# Altium PCB DIOT_SYS_extender_card.PcbDoc (part 2 of 6)
Units mm, origin at the board's own origin, x right, y up, seen from the top; angles counter-clockwise.
Board outline 280.04 x 100 mm, 6 copper layers (Top Layer, L2GND, L3, L4, L5GND, Bottom Layer), stack 1.558 mm thick; 18 components, 344 nets, 1062 pads, 179 vias.
Unrouted connection lines stored in the file: 389.
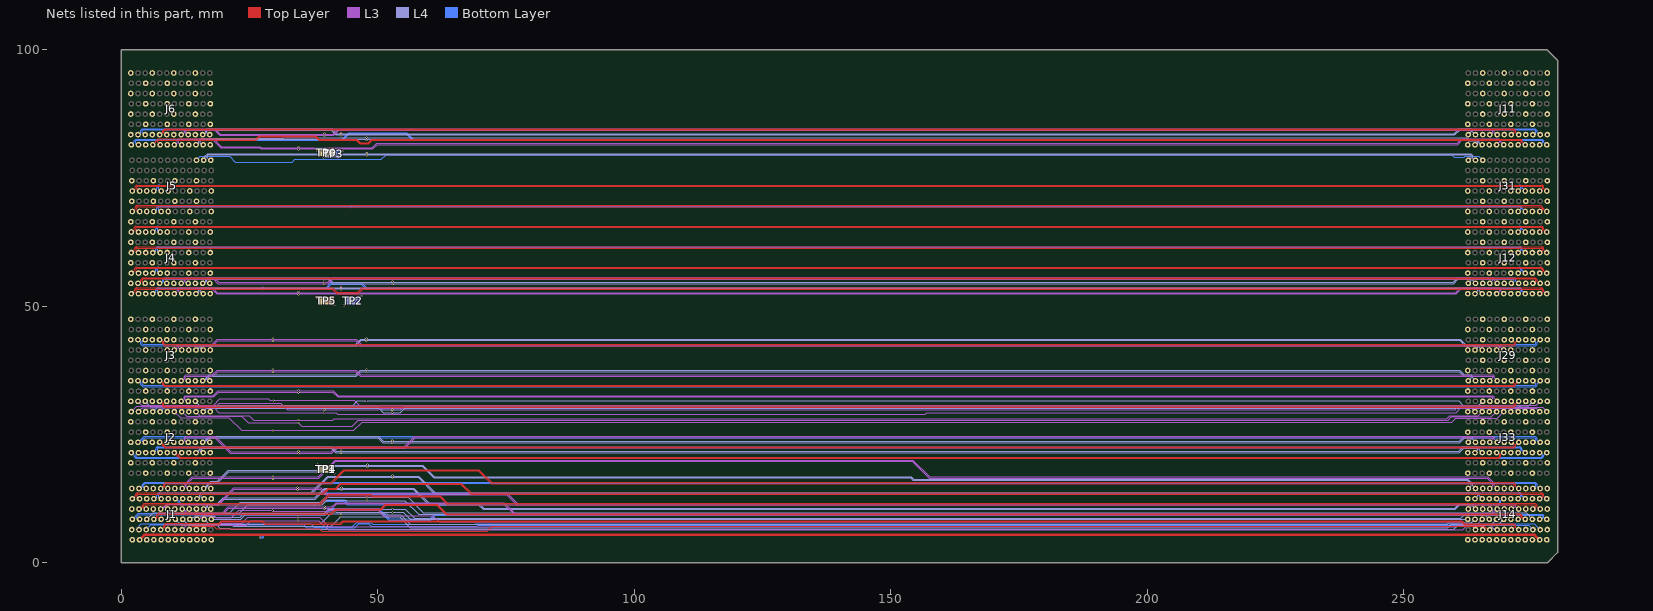
[diagram p6: the nets of this part, all layers, seen from the top]

## Via types
v1: diameter 0.4, hole 0.2, Top Layer to Bottom Layer, tented both sides, 179 vias

## Nets (pads, with @x,y where several pads share a name; then routed paths per layer and width w, separated by ;. In a path a pad name is that pad's centre, name@x,y a point inside that pad or via, vN(x,y) a via of type N, cw(c..) or ccw(c..) an arc to the next point about the centre after c; other vN are vias at no path point) (continued)
8_PE_CLK_N: J5.L6 J31.L6 | length 249.3
  L4 w0.085: J5.L6@17.5,78.5 17.233,78.5 16.659,79.073 16.659,79.245 16.969,79.555 47.709,79.555 47.826,79.438 47.997,79.438 48.098,79.539 263,79.539 263.216,79.323 263.216,78.913 262.803,78.5 J31.L6@262.639,78.5
  other v1: 47.912,79.438
8_PE_CLK_P: J5.K6 J31.K6 | length 249.7
  L4 w0.085: J5.K6@16.1,78.5 16.1,78.743 16.414,79.057 16.414,79.347 16.868,79.8 47.709,79.8 47.826,79.918 47.986,79.918 48.119,79.784 263.101,79.784 263.461,79.424 263.461,78.913 263.875,78.5 J31.K6@264.039,78.5
  other v1: 47.912,79.918
8_SERVMOD: J5.J6 J31.J6 | length 252.7
  Bottom Layer w0.1: J5.J6@14.7,78.5 15.468,79.268 21.158,79.268 22.285,78.14 32.77,78.14 33.349,78.14 33.887,78.678 50.761,78.678 51.684,79.6 259.4,79.6 259.9,79.1 261.875,79.1 262.025,79.25 264.689,79.25 J31.J6@265.439,78.5
CPCIS_I2C_SCL: J1.B2 J14.B2 | length 275.3
  Bottom Layer w0.085: J1.B2@3.5,6.5 3.5,7.26 3.89,7.65 36.95,7.65 37.55,7.05 45.05,7.05 45.871,7.871 48.751,7.871 49.107,7.515 68.765,7.515 68.9,7.65 275.489,7.65 J14.B2@276.639,6.5
CPCIS_I2C_SDA: J1.C2 J14.C2 | length 271.9
  Bottom Layer w0.085: J1.C2@4.9,6.5 5.825,7.425 32.649,7.425 35.575,7.425 36.133,6.867 45.592,6.867 46.325,7.6 48.325,7.6 48.8,7.125 69.379,7.125 69.604,7.35 274.389,7.35 J14.C2@275.239,6.5
F_IO0: J2.K7 J33.K7 | length 249.2
  L4 w0.085: J2.K7@16,29.5 16.673,30.173 50.227,30.173 51.1,29.3 v1(52.869,29.3) 54.385,29.3 55.257,30.173 257.578,30.173 263.266,30.173 J33.K7@263.939,29.5
F_IO1: J2.J8 J33.J8 | length 252.3
  L4 w0.085: J2.J8@14.5,31.5 15.257,30.743 45.215,30.743 46.072,31.6 v1(47.825,31.6) 260.741,31.6 261.598,30.743 264.682,30.743 J33.J8@265.439,31.5
F_RST: J2.J7 J33.J7 | length 252.1
  L3 w0.085: J2.J7@14.6,29.5 15.375,28.725 24.957,28.725 25.84,27.842 v1(34.572,27.842) 41.289,27.842 41.586,28.14 258.44,28.14 259.025,28.725 264.564,28.725 J33.J7@265.339,29.5
GA2: J1.I3 J14.I3 | length 255.7
  L4 w0.085: J1.I3@13.4,8.5 13.488,8.5 13.888,8.9 14.249,8.9 14.521,9.173 17.879,9.173 18.151,8.9 23.213,8.9 23.953,9.64 39.665,9.64 40.491,10.466 55.434,10.466 57.205,8.695 261.145,8.695 261.725,9.275 265.964,9.275 J14.I3@266.739,8.5
  other v1: 52.928,10.466
GA3: J1.L3 J14.L3 | length 246.2
  L4 w0.085: J1.L3@17.6,8.5 23.325,8.5 24.182,9.357 39.882,9.357 40.488,9.963 41.88,9.963 41.953,9.89 52.849,9.89 52.907,9.832 52.951,9.875 55.025,9.875 56.4,8.5 J14.L3@262.539,8.5
  other v1: 52.921,9.845
GND: J1.A2 J1.A4 J1.A6 J1.C1 J1.C5 J1.D2 J1.D4 J1.D6 J1.F1 J1.F5 J1.G2 J1.G4 J1.G6 J1.I1 J1.I5 J1.J2 J1.J4 J1.J6 J1.L1 J1.L5 J2.A2 J2.A4 J2.A6 J2.A8 J2.C1 J2.C3 J2.C5 J2.C7 J2.D2 J2.D4 J2.D6 J2.D8 J2.F1 J2.F3 J2.F5 J2.F7 J2.G2 J2.G4 J2.G6 J2.G8 J2.I1 J2.I3 J2.I5 J2.I7 J2.J2 J2.J4 J2.J6 J2.L1 J2.L3 J2.L5 J2.L7 J3.A2 J3.A6 J3.A8 J3.C1 J3.C3 J3.C5 J3.C7 J3.D2 J3.D6 J3.D8 J3.F1 J3.F3 J3.F5 J3.F7 J3.G2 J3.G6 J3.G8 J3.I1 J3.I3 J3.I5 J3.I7 J3.J2 J3.J6 J3.J8 J3.L1 J3.L3 J3.L5 J3.L7 J4.A2 J4.A4 J4.A6 J4.A8 J4.C1 J4.C3 J4.C5 J4.C7 J4.D2 J4.D4 J4.D6 J4.D8 J4.F1 J4.F3 J4.F5 J4.F7 J4.G2 J4.G4 J4.G6 J4.G8 J4.I1 J4.I3 J4.I5 J4.I7 J4.J2 J4.J4 J4.J6 J4.J8 J4.L1 J4.L3 J4.L5 J4.L7 J5.A2 J5.A4 J5.C1 J5.C3 J5.D2 J5.D4 J5.F1 J5.F3 J5.G2 J5.G4 J5.I1 J5.I3 J5.J2 J5.J4 J5.L1 J5.L3 J6.A2 J6.A4 J6.A6 J6.A8 J6.C1 J6.C3 J6.C5 J6.C7 J6.D2 J6.D4 J6.D6 J6.D8 J6.F1 J6.F3 J6.F5 J6.F7 J6.G2 J6.G4 J6.G6 J6.G8 J6.I1 J6.I3 J6.I5 J6.I7 J6.J2 J6.J4 J6.J6 J6.J8 J6.L1 J6.L3 J6.L5 J6.L7 J11.A2 J11.A4 J11.A6 J11.A8 J11.C1 J11.C3 J11.C5 J11.C7 J11.D2 J11.D4 J11.D6 J11.D8 J11.F1 J11.F3 J11.F5 J11.F7 J11.G2 J11.G4 J11.G6 J11.G8 J11.I1 J11.I3 J11.I5 J11.I7 J11.J2 J11.J4 J11.J6 J11.J8 J11.L1 J11.L3 J11.L5 J11.L7 J12.A2 J12.A4 J12.A6 J12.A8 J12.C1 J12.C3 J12.C5 J12.C7 J12.D2 J12.D4 J12.D6 J12.D8 J12.F1 J12.F3 J12.F5 J12.F7 J12.G2 J12.G4 J12.G6 J12.G8 J12.I1 J12.I3 J12.I5 J12.I7 J12.J2 J12.J4 J12.J6 J12.J8 J12.L1 J12.L3 J12.L5 J12.L7 J14.A2 J14.A4 J14.A6 J14.C1 J14.C5 J14.D2 J14.D4 J14.D6 J14.F1 J14.F5 J14.G2 J14.G4 J14.G6 J14.I1 J14.I5 J14.J2 J14.J4 J14.J6 J14.L1 J14.L5 J29.A2 J29.A4 J29.A6 J29.A8 J29.C1 J29.C3 J29.C5 J29.C7 J29.D2 J29.D4 J29.D6 J29.D8 J29.F1 J29.F3 J29.F5 J29.F7 J29.G2 J29.G4 J29.G6 J29.G8 J29.I1 J29.I3 J29.I5 J29.I7 J29.J2 J29.J4 J29.J6 J29.J8 J29.L1 J29.L3 J29.L5 J29.L7 J31.A2 J31.A4 J31.C1 J31.C3 J31.D2 J31.D4 J31.F1 J31.F3 J31.G2 J31.G4 J31.I1 J31.I3 J31.J2 J31.J4 J31.L1 J31.L3 J33.A2 J33.A4 J33.A6 J33.A8 J33.C1 J33.C3 J33.C5 J33.C7 J33.D2 J33.D4 J33.D6 J33.D8 J33.F1 J33.F3 J33.F5 J33.F7 J33.G2 J33.G4 J33.G6 J33.G8 J33.I1 J33.I3 J33.I5 J33.I7 J33.J2 J33.J4 J33.J6 J33.L1 J33.L3 J33.L5 J33.L7 TP1.1 TP2.1 TP3.1 TP4.1 TP5.1 TP6.1 | length 24.2
  Top Layer w0.2: v1(38.2,51.6) 39.486,51.6 TP5.1@39.986,51.1 40.761,51.1 41.561,50.3 v1(41.645,50.3) ; v1(38.2,80.361) 39.625,80.361 TP6.1@39.986,80 39.426,79.441 v1(39.426,79.008) ; v1(38.3,19.2) 38.3,19.186 39.211,18.275 TP4.1@39.986,18.275 40.761,18.275 41.636,17.4 v1(41.645,17.4)
  Bottom Layer w0.2: v1(38.3,19.2) 38.338,19.162 38.338,19.081 39.144,18.275 TP1.1@39.919,18.275 40.694,18.275 41.531,17.438 41.607,17.438 v1(41.645,17.4) ; v1(39.426,79.008) 39.404,79.03 39.404,79.608 39.565,79.769 TP3.1@41.353,79.769 41.846,80.263 v1(43.208,80.263) ; v1(43.417,50.191) 43.457,50.191 44.366,51.1 45.916,51.1 46.816,51.999 v1(46.838,51.999)
LVDS15_N: J1.F2 J14.F2 | length 266.3
  Top Layer w0.11: J1.F2@9.1,6.5 8.86,6.5 8.52,6.84 8.52,7.184 8.792,7.456 19.095,7.456 19.623,7.984 27.552,7.984 27.985,7.551 42.911,7.551 43.36,8 54.998,8 261.286,8 261.861,7.425 271.394,7.425 271.619,7.2 271.619,7.031 271.619,6.84 271.279,6.5 J14.F2@271.039,6.5
LVDS15_P: J1.E2 J14.E2 | length 267.1
  Top Layer w0.11: J1.E2@7.7,6.5 7.94,6.5 8.28,6.84 8.28,7.283 8.693,7.696 18.996,7.696 19.524,8.224 27.651,8.224 28.084,7.791 42.811,7.791 43.261,8.24 54.998,8.24 261.385,8.24 261.96,7.665 271.493,7.665 271.859,7.299 271.859,6.931 271.859,6.84 272.199,6.5 J14.E2@272.439,6.5
M_SCL: J2.A7 J33.A7 | length 277.9
  L3 w0.085: J2.A7@2,29.5 3.025,30.525 18.521,30.525 19.096,31.1 31.171,31.1 32.421,29.85 v1(39.615,29.85) 50.2,29.85 50.523,30.173 54.961,30.173 55.284,29.85 260.05,29.85 260.538,30.338 277.101,30.338 J33.A7@277.939,29.5
M_SDA: J2.B7 J33.B7 | length 274.7
  L3 w0.085: J2.B7@3.4,29.5 4.125,30.225 18.132,30.225 19.057,29.3 v1(39.598,29.3) 41.917,29.3 42.24,28.977 156.757,28.977 157.079,29.3 260.238,29.3 261.11,30.173 275.866,30.173 J33.B7@276.539,29.5
MGT1_Rx_N: J1.E5 J14.E5 | length 267.8
  Bottom Layer w0.11: J1.E5@7.8,12.5 cw(c7.8,13.08) 7.22,13.08 7.22,13.1 cw(c7.52,13.1) 7.52,13.4 25.1,13.4 272.519,13.4 cw(c272.519,12.997) 272.922,12.997 272.425,12.5 J14.E5@272.339,12.5
MGT1_Rx_P: J1.D5 J14.D5 | length 268.6
  Bottom Layer w0.11: J1.D5@6.4,12.5 ccw(c6.4,13.08) 6.98,13.08 6.98,13.1 cw(c7.52,13.1) 7.52,13.64 25.1,13.64 272.519,13.64 cw(c272.519,13) 273.159,13 273.159,12.994 273.653,12.5 J14.D5@273.739,12.5
MGT1_Tx_N: J1.B5 J14.B5 | length 277.9
  Top Layer w0.11: J1.B5@3.6,12.5 cw(c3.6,13.08) 3.02,13.08 3.02,13.165 cw(c3.255,13.165) 3.088,13.331 cw(c3.255,13.165) 3.089,13.332 cw(c3.255,13.165) 3.255,13.4 39.5,13.4 40.453,14.353 41.912,14.353 42.866,15.306 54.963,15.306 66.219,15.306 68.125,13.4 276.8,13.4 cw(c276.8,13.081) 277.119,13.081 277.119,13.007 cw(c276.612,13.007) 276.612,12.5 J14.B5@276.539,12.5
MGT1_Tx_P: J1.A5 J14.A5 | length 278.7
  Top Layer w0.11: J1.A5@2.2,12.5 ccw(c2.2,13.08) 2.78,13.08 cw(c3.246,13.167) 3.246,13.64 39.401,13.64 40.354,14.593 41.813,14.593 42.766,15.546 54.963,15.546 66.318,15.546 68.224,13.64 276.8,13.64 cw(c276.8,13.081) 277.359,13.081 277.359,13.007 ccw(c277.866,13.007) 277.866,12.5 J14.A5@277.939,12.5
MGT2_Rx_N: J2.E3 J33.E3 | length 268.1
  Bottom Layer w0.11: J2.E3@7.6,21.5 cw(c7.6,22.08) 7.02,22.08 7.02,22.2 cw(c7.22,22.2) 7.22,22.4 25.2,22.4 272.519,22.4 cw(c272.519,21.997) 272.922,21.997 272.425,21.5 J33.E3@272.339,21.5
MGT2_Rx_P: J2.D3 J33.D3 | length 268.8
  Bottom Layer w0.11: J2.D3@6.2,21.5 ccw(c6.2,22.08) 6.78,22.08 6.78,22.2 cw(c7.22,22.2) 7.22,22.64 25.2,22.64 272.519,22.64 cw(c272.519,22) 273.159,22 273.159,21.994 273.653,21.5 J33.D3@273.739,21.5
MGT2_Tx_N: J2.B3 J33.B3 | length 276.5
  Bottom Layer w0.11: J2.B3@3.4,21.5 ccw(c3.4,20.92) 2.82,20.92 2.82,20.825 ccw(c3.045,20.825) 3.045,20.6 25.2,20.6 264.8,20.6 276.719,20.6 ccw(c276.719,21.003) 277.122,21.003 276.625,21.5 J33.B3@276.539,21.5
MGT2_Tx_P: J2.A3 J33.A3 | length 277.2
  Bottom Layer w0.11: J2.A3@2,21.5 cw(c2,20.92) 2.58,20.92 2.58,20.825 ccw(c3.045,20.825) 3.045,20.36 25.2,20.36 264.8,20.36 276.719,20.36 ccw(c276.719,21) 277.359,21 277.359,21.006 277.853,21.5 J33.A3@277.939,21.5
MGT3_RxC_N: J4.E1 J12.E1 | length 268.9
  Bottom Layer w0.11: J4.E1@7.6,52.5 cw(c7.6,53.08) 7.02,53.08 7.02,53.125 cw(c7.295,53.125) 7.295,53.4 24.7,53.4 27.643,53.4 ; 27.643,53.206 27.837,53.4 33.791,53.4 40.08,53.4 41.018,54.338 46.838,54.338 47.775,53.4 272.519,53.4 cw(c272.519,52.997) 272.922,52.997 272.425,52.5 J12.E1@272.339,52.5
MGT3_RxC_P: J4.D1 J12.D1 | length 269.7
  Bottom Layer w0.11: J4.D1@6.2,52.5 ccw(c6.2,53.08) 6.78,53.08 6.78,53.125 cw(c7.295,53.125) 7.295,53.64 24.7,53.64 27.334,53.64 27.339,53.646 27.448,53.646 27.643,53.841 27.838,53.646 27.947,53.646 27.953,53.64 33.89,53.64 39.981,53.64 40.918,54.578 46.937,54.578 47.874,53.64 272.519,53.64 cw(c272.519,53) 273.159,53 273.159,52.994 273.653,52.5 J12.D1@273.739,52.5
MGT3_Tx_N: J4.B1 J12.B1 | length 277.2
  Top Layer w0.11: J4.B1@3.4,52.5 3.369,52.5 cw(c3.369,53.049) 2.82,53.049 cw(c3.149,53.049) 3.149,53.378 41.212,53.378 42.08,52.51 46.238,52.51 47.106,53.378 49.999,53.378 276.739,53.378 cw(c276.739,52.997) 277.119,52.997 cw(c276.621,52.997) 276.621,52.5 J12.B1@276.539,52.5
MGT3_Tx_P: J4.A1 J12.A1 | length 277.9
  Top Layer w0.11: J4.A1@2,52.5 2.031,52.5 ccw(c2.031,53.049) 2.58,53.049 2.58,53.08 cw(c3.118,53.08) 3.118,53.618 41.311,53.618 42.179,52.75 46.138,52.75 47.006,53.618 49.999,53.618 276.739,53.618 cw(c276.739,52.997) 277.359,52.997 ccw(c277.856,52.997) 277.856,52.5 J12.A1@277.939,52.5
MGT4_RxC_N: J4.E3 J12.E3 | length 268.1
  Bottom Layer w0.11: J4.E3@7.6,56.5 cw(c7.6,57.08) 7.02,57.08 7.02,57.2 cw(c7.22,57.2) 7.22,57.4 24.7,57.4 272.519,57.4 cw(c272.519,56.997) 272.922,56.997 272.425,56.5 J12.E3@272.339,56.5
MGT4_RxC_P: J4.D3 J12.D3 | length 268.8
  Bottom Layer w0.11: J4.D3@6.2,56.5 ccw(c6.2,57.08) 6.78,57.08 6.78,57.2 cw(c7.22,57.2) 7.22,57.64 24.7,57.64 272.519,57.64 cw(c272.519,57) 273.159,57 273.159,56.994 273.653,56.5 J12.D3@273.739,56.5
MGT4_Tx_N: J4.B3 J12.B3 | length 276.5
  Top Layer w0.11: J4.B3@3.4,56.5 cw(c3.4,57.08) 2.82,57.08 cw(c3.14,57.08) 3.14,57.4 276.695,57.4 cw(c276.695,56.976) 277.119,56.976 cw(c276.643,56.976) 276.643,56.5 J12.B3@276.539,56.5
MGT4_Tx_P: J4.A3 J12.A3 | length 277.3
  Top Layer w0.11: J4.A3@2,56.5 ccw(c2,57.08) 2.58,57.08 2.58,57.179 cw(c3.041,57.179) 3.041,57.64 276.695,57.64 cw(c276.695,56.976) 277.359,56.976 ccw(c277.835,56.976) 277.835,56.5 J12.A3@277.939,56.5
MGT5_RxC_N: J4.E5 J12.E5 | length 268
  Bottom Layer w0.11: J4.E5@7.6,60.5 cw(c7.6,61.08) 7.02,61.08 7.02,61.15 cw(c7.27,61.15) 7.27,61.4 24.7,61.4 272.519,61.4 cw(c272.519,60.997) 272.922,60.997 272.425,60.5 J12.E5@272.339,60.5
MGT5_RxC_P: J4.D5 J12.D5 | length 268.8
  Bottom Layer w0.11: J4.D5@6.2,60.5 ccw(c6.2,61.08) 6.78,61.08 6.78,61.15 cw(c7.27,61.15) 7.27,61.64 24.7,61.64 272.519,61.64 cw(c272.519,61) 273.159,61 273.159,60.994 273.653,60.5 J12.D5@273.739,60.5
MGT5_Tx_N: J4.B5 J12.B5 | length 276.5
  Top Layer w0.11: J4.B5@3.4,60.5 3.329,60.5 cw(c3.329,61.009) 2.82,61.009 cw(c3.195,61.009) 3.195,61.383 276.905,61.383 cw(c276.905,61.17) 277.119,61.17 277.119,61.08 cw(c276.539,61.08) J12.B5@276.539,60.5
MGT5_Tx_P: J4.A5 J12.A5 | length 277.3
  Top Layer w0.11: J4.A5@2,60.5 2.071,60.5 ccw(c2.071,61.009) 2.58,61.009 2.58,61.108 cw(c3.095,61.108) 3.095,61.623 276.905,61.623 cw(c276.905,61.17) 277.359,61.17 277.359,61.08 ccw(c277.939,61.08) J12.A5@277.939,60.5
MGT6_RxC_N: J4.E7 J12.E7 | length 268.1
  Bottom Layer w0.11: J4.E7@7.6,64.5 cw(c7.6,65.08) 7.02,65.08 7.02,65.175 cw(c7.245,65.175) 7.245,65.4 24.7,65.4 272.519,65.4 cw(c272.519,64.997) 272.922,64.997 272.425,64.5 J12.E7@272.339,64.5
MGT6_RxC_P: J4.D7 J12.D7 | length 268.8
  Bottom Layer w0.11: J4.D7@6.2,64.5 ccw(c6.2,65.08) 6.78,65.08 6.78,65.175 cw(c7.245,65.175) 7.245,65.64 24.7,65.64 272.519,65.64 cw(c272.519,65) 273.159,65 273.159,64.994 273.653,64.5 J12.D7@273.739,64.5
MGT6_Tx_N: J4.B7 J12.B7 | length 276.6
  Top Layer w0.11: J4.B7@3.4,64.5 3.34,64.5 cw(c3.34,65.02) 2.82,65.02 2.82,65.208 cw(c3.008,65.208) 3.008,65.396 276.744,65.396 cw(c276.744,65.022) 277.119,65.022 cw(c276.597,65.022) 276.597,64.5 J12.B7@276.539,64.5
MGT6_Tx_P: J4.A7 J12.A7 | length 277.4
  Top Layer w0.11: J4.A7@2,64.5 2.06,64.5 ccw(c2.06,65.02) 2.58,65.02 2.58,65.307 cw(c2.909,65.307) 2.909,65.636 276.744,65.636 cw(c276.744,65.022) 277.359,65.022 ccw(c277.881,65.022) 277.881,64.5 J12.A7@277.939,64.5
MGT7_RxC_N: J5.E1 J31.E1 | length 267.9
  Bottom Layer w0.11: J5.E1@7.8,68.5 cw(c7.8,69.08) 7.22,69.08 7.22,69.225 cw(c7.395,69.225) 7.395,69.4 24.777,69.4 272.519,69.4 cw(c272.519,68.997) 272.922,68.997 272.425,68.5 J31.E1@272.339,68.5
MGT7_RxC_P: J5.D1 J31.D1 | length 268.6
  Bottom Layer w0.11: J5.D1@6.4,68.5 ccw(c6.4,69.08) 6.98,69.08 6.98,69.225 cw(c7.395,69.225) 7.395,69.64 24.777,69.64 272.519,69.64 cw(c272.519,69) 273.159,69 273.159,68.994 273.653,68.5 J31.D1@273.739,68.5
MGT7_Tx_N: J5.B1 J31.B1 | length 276.2
  Top Layer w0.11: J5.B1@3.6,68.5 3.53,68.5 cw(c3.53,69.01) 3.02,69.01 3.02,69.2 cw(c3.274,69.2) 3.274,69.454 44.782,69.454 ; 44.999,69.237 45.194,69.432 45.306,69.432 45.308,69.434 276.665,69.434 277.119,68.981 277.119,68.84 276.779,68.5 J31.B1@276.539,68.5
MGT7_Tx_P: J5.A1 J31.A1 | length 277.2
  Top Layer w0.11: J5.A1@2.2,68.5 2.27,68.5 ccw(c2.27,69.01) 2.78,69.01 2.78,69.299 cw(c3.175,69.299) 3.175,69.694 44.821,69.694 ; 44.859,69.716 45.234,69.716 45.276,69.674 276.764,69.674 277.359,69.08 277.359,68.84 277.699,68.5 J31.A1@277.939,68.5
MGT8_RxC_N: J5.E3 J31.E3 | length 267.8
  Bottom Layer w0.11: J5.E3@7.8,72.5 7.795,72.5 cw(c7.795,73.075) 7.22,73.075 cw(c7.545,73.075) 7.545,73.4 24.7,73.4 272.519,73.4 cw(c272.519,72.997) 272.922,72.997 272.425,72.5 J31.E3@272.339,72.5
MGT8_RxC_P: J5.D3 J31.D3 | length 268.6
  Bottom Layer w0.11: J5.D3@6.4,72.5 6.405,72.5 ccw(c6.405,73.075) 6.98,73.075 cw(c7.545,73.075) 7.545,73.64 24.7,73.64 272.519,73.64 cw(c272.519,73) 273.159,73 273.159,72.994 273.653,72.5 J31.D3@273.739,72.5
MGT8_Tx_N: J5.B3 J31.B3 | length 276.4
  Top Layer w0.11: J5.B3@3.6,72.5 3.595,72.5 cw(c3.595,73.075) 3.02,73.075 3.02,73.228 cw(c3.172,73.228) 3.172,73.38 276.929,73.38 cw(c276.929,73.19) 277.119,73.19 277.119,73.08 cw(c276.539,73.08) J31.B3@276.539,72.5
MGT8_Tx_P: J5.A3 J31.A3 | length 277.2
  Top Layer w0.11: J5.A3@2.2,72.5 2.205,72.5 ccw(c2.205,73.075) 2.78,73.075 2.78,73.327 cw(c3.073,73.327) 3.073,73.62 276.929,73.62 cw(c276.929,73.19) 277.359,73.19 277.359,73.08 ccw(c277.939,73.08) J31.A3@277.939,72.5
P5V0_MP: J1.B1 J14.B1 | length 273.7
  Top Layer w0.5: J1.B1@3.6,4.5 4.567,5.468 275.533,5.468 276.5,4.5 J14.B1@276.539,4.5
P12V0: J1.A1 J1.D1 J1.E1 J1.G1 J1.H1 J1.J1 J1.K1 J14.A1 J14.D1 J14.E1 J14.G1 J14.H1 J14.J1 J14.K1 | length 0.6
  Bottom Layer w0.4: v1(27.1,4.938) 27.112,4.95 27.604,4.95 27.654,5
P_IO0: J2.C8 J33.C8 | length 271.9
  L4 w0.085: J2.C8@4.7,31.5 5.73,30.47 50.276,30.47 50.896,29.85 v1(52.86,29.85) 54.511,29.85 55.132,30.47 274.209,30.47 J33.C8@275.239,31.5
P_IO1: J2.D7 J33.D7 | length 268.6
  Bottom Layer w0.085: J2.D7@6.2,29.5 7.425,30.725 27.638,30.725 272.514,30.725 J33.D7@273.739,29.5
P_IO2: J2.E7 J33.E7 | length 265.5
  Bottom Layer w0.085: J2.E7@7.6,29.5 8.575,30.475 27.638,30.475 271.364,30.475 J33.E7@272.339,29.5
P_PRES0_N: J2.G7 J33.G7 | length 262.2
  L3 w0.085: J2.G7@10.4,29.5 11.6,28.3 21,28.3 23.49,25.81 v1(29.597,25.81) 45.37,25.81 47.015,27.455 259.455,27.455 260.235,28.235 268.274,28.235 268.527,28.488 J33.G7@269.539,29.5
P_PRES1_N: J2.H7 J33.H7 | length 258.7
  L3 w0.085: J2.H7@11.8,29.5 12.758,28.543 23.557,28.543 24.8,27.3 v1(34.572,27.3) 35.257,26.615 45.023,26.615 46.25,27.842 258.695,27.842 259.332,28.479 267.118,28.479 J33.H7@268.139,29.5
P_RST: J2.B8 J33.B8 | length 275
  L3 w0.085: J2.B8@3.3,31.5 4.05,30.75 18.051,30.75 19.282,31.981 28.699,31.981 28.979,31.7 v1(29.675,31.7) 45.46,31.7 46.41,30.75 275.889,30.75 J33.B8@276.639,31.5
PE_CLK_N: J1.F4 J14.F4 | length 267.8
  L3 w0.085: J1.F4@9.1,10.5 8.833,10.5 8.523,10.81 8.523,10.881 9.067,11.425 19.15,11.425 22.096,14.371 v1@34.389,14.371 ; v1(34.389,14.253) 34.419,14.253 34.536,14.371 38.829,14.371 39.875,13.325 75.15,13.325 77.129,11.346 271.479,11.346 271.616,11.209 271.616,10.81 271.306,10.5 J14.F4@271.039,10.5
PE_CLK_P: J1.E4 J14.E4 | length 268.6
  L3 w0.085: J1.E4@7.7,10.5 7.967,10.5 8.278,10.81 8.278,10.982 8.965,11.67 19.049,11.67 21.994,14.616 v1@34.389,14.616 ; v1(34.389,14.733) 34.419,14.733 34.536,14.616 38.931,14.616 39.976,13.57 75.251,13.57 77.231,11.591 271.581,11.591 271.861,11.31 271.861,10.81 272.171,10.5 J14.E4@272.439,10.5
PRST_N: J1.H2 J14.H2 | length 258.6
  L3 w0.085: J1.H2@11.9,6.5 13.149,7.749 23.549,7.749 24.656,8.856 v1(34.523,8.856) 38.682,8.856 40.488,7.05 260.375,7.05 260.725,7.4 266.89,7.4 267.596,6.694 268.045,6.694 J14.H2@268.239,6.5
PWR_FAIL_N: J1.F3 J14.F3 | length 264.8
  L4 w0.085: J1.F3@9.2,8.5 10.285,9.585 22.987,9.585 24.743,11.341 39.188,11.341 40.047,12.2 43.87,12.2 43.939,12.132 v1(47.907,12.132) 55.343,12.132 57.984,9.491 269.947,9.491 J14.F3@270.939,8.5
PWRBTN_N: J1.C3 J14.C3 | length 273.7
  L4 w0.085: J1.C3@5,8.5 6.25,9.75 21.203,9.75 23.253,11.8 38.926,11.8 39.89,12.765 47.913,12.765 v1(47.923,12.755) 47.933,12.765 55.934,12.765 58.949,9.75 273.889,9.75 J14.C3@275.139,8.5
SERVMOD: J1.K2 J14.K2 | length 250
  L3 w0.085: J1.K2@16.1,6.5 16.934,7.334 24.435,7.334 25.326,8.225 34.522,8.225 v1(34.523,8.224) 34.524,8.225 38.578,8.225 40.378,6.425 261.525,6.425 262.273,7.173 263.366,7.173 J14.K2@264.039,6.5
SHARED_BUS_0: J1.I2 J14.I2 | length 254.9
  Top Layer w0.085: J1.I2@13.3,6.5 13.973,7.173 18.102,7.173 18.575,6.7 38.611,6.7 39.115,6.196 49.973,6.196 49.999,6.17 71.37,6.17 72.375,7.175 265.715,7.175 266.196,6.694 266.645,6.694 J14.I2@266.839,6.5
SHARED_BUS_1: J1.G3 J14.G3 | length 260.5
  L4 w0.085: J1.G3@10.6,8.5 11.8,7.3 18.77,7.3 19.283,6.786 21.203,6.786 21.412,6.577 259.845,6.577 260.568,7.3 268.339,7.3 J14.G3@269.539,8.5
SHARED_BUS_2: J1.H3 J14.H3 | length 259
  L4 w0.085: J1.H3@12,8.5 12.98,7.52 21.453,7.52 21.873,7.1 40.967,7.1 v1(42.818,8.951) 54.299,8.951 56.386,6.864 258.664,6.864 259.323,7.523 267.162,7.523 J14.H3@268.139,8.5
SHARED_BUS_3: J1.J3 J14.J3 | length 253.1
  L3 w0.085: J1.J3@14.8,8.5 14.994,8.694 15.443,8.694 15.979,9.23 18.17,9.23 18.575,8.825 21.5,8.825 22.922,10.247 29.539,10.247 29.686,10.1 39.991,10.1 40.138,10.247 50.103,10.247 51.125,9.225 60.794,9.225 62.019,8 261.688,8 262.025,7.663 264.501,7.663 J14.J3@265.339,8.5
  other v1: 29.478,10.247
SHARED_BUS_4: J1.K3 J14.K3 | length 250.2
  L4 w0.085: J1.K3@16.2,8.5 17,7.7 22.1,7.7 22.284,7.516 22.516,7.516 22.523,7.523 38.798,7.523 40.842,9.567 v1(42.846,9.567) 51.824,9.567 52.024,9.368 54.532,9.368 56.377,7.523 258.569,7.523 258.846,7.8 263.239,7.8 J14.K3@263.939,8.5
SLOT1.LVDS_0_N: J1.B3 J14.B3 | length 277.9
  Bottom Layer w0.11: J1.B3@3.6,8.5 3.36,8.5 3.02,8.84 3.02,9.02 3.4,9.4 39.702,9.4 40.702,10.4 50.125,10.4 52.165,8.36 60.324,8.36 61.224,9.26 277.054,9.26 277.119,9.195 277.119,8.84 276.779,8.5 J14.B3@276.539,8.5
SLOT1.LVDS_0_P: J1.A3 J14.A3 | length 278.7
  Bottom Layer w0.11: J1.A3@2.2,8.5 2.44,8.5 2.78,8.84 2.78,9.119 3.301,9.64 39.603,9.64 40.603,10.64 50.224,10.64 52.264,8.6 60.225,8.6 61.125,9.5 277.154,9.5 277.359,9.295 277.359,8.84 277.699,8.5 J14.A3@277.939,8.5
SLOT1.LVDS_1_N: J1.E3 J14.E3 | length 269.5
  Top Layer w0.11: J1.E3@7.8,8.5 7.56,8.5 7.22,8.84 7.22,9.298 7.447,9.525 41.073,9.525 41.908,10.36 45.001,10.36 48.779,10.36 ; 48.779,10.355 50.767,10.355 51.638,11.225 61.525,11.225 63.393,9.357 272.673,9.357 272.919,9.111 272.919,8.84 272.579,8.5 J14.E3@272.339,8.5
SLOT1.LVDS_1_P: J1.D3 J14.D3 | length 270.3
  Top Layer w0.11: J1.D3@6.4,8.5 6.64,8.5 6.98,8.84 6.98,9.397 7.348,9.765 40.974,9.765 41.809,10.6 45.001,10.6 48.68,10.6 48.685,10.595 50.668,10.595 51.538,11.465 61.624,11.465 63.493,9.597 272.772,9.597 273.159,9.21 273.159,8.84 273.499,8.5 J14.D3@273.739,8.5
SLOT1.LVDS_2_N: J1.C4 J14.C4 | length 275.2
  Top Layer w0.11: J1.C4@4.9,10.5 4.66,10.5 4.32,10.84 4.32,11.085 4.611,11.376 38.846,11.376 40.604,13.135 48.623,13.135 48.883,12.875 62.111,12.875 63.609,11.376 275.6,11.376 275.819,11.158 275.819,10.84 275.479,10.5 J14.C4@275.239,10.5
SLOT1.LVDS_2_P: J1.B4 J14.B4 | length 276
  Top Layer w0.11: J1.B4@3.5,10.5 3.74,10.5 4.08,10.84 4.08,11.185 4.511,11.616 38.746,11.616 40.505,13.375 48.723,13.375 48.983,13.115 62.21,13.115 63.709,11.616 275.7,11.616 276.059,11.257 276.059,10.84 276.399,10.5 J14.B4@276.639,10.5
SLOT1.LVDS_3_N: J1.I4 J14.I4 | length 258.7
  L3 w0.085: J1.I4@13.3,10.5 13.033,10.5 12.723,10.19 12.723,9.777 12.78,9.72 19.723,9.72 20.921,10.919 39.833,10.919 41.098,10.919 41.949,11.77 74.651,11.77 76.701,9.72 267.316,9.72 267.416,9.82 267.416,10.19 267.106,10.5 J14.I4@266.839,10.5
  other v1: 39.614,11.036
SLOT1.LVDS_3_P: J1.H4 J14.H4 | length 259.4
  L3 w0.085: J1.H4@11.9,10.5 12.167,10.5 12.478,10.19 12.478,9.676 12.679,9.475 19.824,9.475 21.023,10.674 39.814,10.674 ; 39.833,10.674 41.199,10.674 42.05,11.525 74.55,11.525 76.6,9.475 267.418,9.475 267.661,9.719 267.661,10.19 267.971,10.5 J14.H4@268.239,10.5
  other v1: 39.614,10.556
SLOT1.LVDS_4_N: J1.L4 J14.L4 | length 251.9
  L4 w0.085: J1.L4@17.5,10.5 17.233,10.5 16.923,10.81 16.923,11.192 17.071,11.341 18.939,11.341 20.033,12.435 37.886,12.435 39.789,14.338 42.729,14.338 42.847,14.221 v1(42.932,14.221) 43.017,14.221 43.135,14.338 56.983,14.338 59.95,11.371 69.629,11.371 70.587,10.413 260.059,10.413 261.046,11.4 263.041,11.4 263.216,11.225 263.216,11.078 J14.L4@262.639,10.5
SLOT1.LVDS_4_P: J1.K4 J14.K4 | length 252.7
  L4 w0.085: J1.K4@16.1,10.5 16.367,10.5 16.678,10.81 16.678,11.294 16.969,11.586 18.838,11.586 19.932,12.68 37.784,12.68 39.687,14.583 42.729,14.583 42.847,14.701 v1(42.932,14.701) 43.017,14.701 43.135,14.583 57.085,14.583 60.051,11.616 69.73,11.616 70.688,10.658 259.957,10.658 260.944,11.645 263.143,11.645 263.461,11.327 263.461,11.078 J14.K4@264.039,10.5
SLOT1.LVDS_5_N: J1.H5 J14.H5 | length 260.2
  Bottom Layer w0.11: J1.H5@12,12.5 11.76,12.5 11.42,12.16 11.42,11.782 11.616,11.586 38.696,11.586 39.396,12.286 43.543,12.286 44.217,11.611 268.533,11.611 268.719,11.797 268.719,12.16 268.379,12.5 J14.H5@268.139,12.5
SLOT1.LVDS_5_P: J1.G5 J14.G5 | length 261.1
  Bottom Layer w0.11: J1.G5@10.6,12.5 10.84,12.5 11.18,12.16 11.18,11.682 11.517,11.346 37.656,11.346 37.696,11.306 ; 37.656,11.161 37.841,11.346 38.796,11.346 39.496,12.046 43.444,12.046 44.118,11.371 268.632,11.371 268.959,11.698 268.959,12.16 269.299,12.5 J14.G5@269.539,12.5
SLOT1.LVDS_6_N: J1.K5 J14.K5 | length 254
  L4 w0.085: J1.K5@16.2,12.5 15.933,12.5 15.623,12.81 15.623,13.273 15.747,13.397 37.1,13.397 40.382,16.68 52.716,16.68 52.833,16.562 v1(52.919,16.562) 53.004,16.562 53.121,16.68 57.895,16.68 61.178,13.397 264.451,13.397 264.516,13.332 264.516,13.078 J14.K5@263.939,12.5
SLOT1.LVDS_6_P: J1.J5 J14.J5 | length 254.8
  L4 w0.085: J1.J5@14.8,12.5 15.067,12.5 15.378,12.81 15.378,13.374 15.646,13.642 36.998,13.642 40.281,16.925 52.716,16.925 52.833,17.042 v1(52.919,17.042) 53.004,17.042 53.121,16.925 57.996,16.925 61.279,13.642 264.552,13.642 264.761,13.434 264.761,13.078 J14.J5@265.339,12.5
SLOT1.LVDS_7_N: J1.C6 J14.C6 | length 273.9
  Bottom Layer w0.11: J1.C6@4.9,14.5 4.66,14.5 4.32,14.84 4.32,15.16 4.685,15.525 27.654,15.525 275.544,15.525 275.819,15.25 275.819,15.031 275.819,14.84 275.479,14.5 J14.C6@275.239,14.5
SLOT1.LVDS_7_P: J1.B6 J14.B6 | length 274.7
  Bottom Layer w0.11: J1.B6@3.5,14.5 3.74,14.5 4.08,14.84 4.08,15.259 4.586,15.765 27.654,15.765 275.643,15.765 276.059,15.349 276.059,14.931 276.059,14.84 276.399,14.5 J14.B6@276.639,14.5
SLOT1.LVDS_8_N: J1.F6 J14.F6 | length 267.6
  Top Layer w0.11: J1.F6@9.1,14.5 8.86,14.5 8.52,14.84 8.52,15.246 8.724,15.45 41.029,15.45 43.53,17.951 44.999,17.951 48.474,17.951 ; 48.474,17.948 69.652,17.948 72.15,15.45 271.436,15.45 271.619,15.267 271.619,14.84 271.279,14.5 J14.F6@271.039,14.5
SLOT1.LVDS_8_P: J1.E6 J14.E6 | length 268.4
  Top Layer w0.11: J1.E6@7.7,14.5 7.94,14.5 8.28,14.84 8.28,15.345 8.625,15.69 40.93,15.69 43.431,18.191 44.999,18.191 48.375,18.191 48.377,18.188 69.751,18.188 72.249,15.69 271.535,15.69 271.859,15.366 271.859,14.84 272.199,14.5 J14.E6@272.439,14.5
SLOT1.LVDS_9_N: J1.I6 J14.I6 | length 260.7
  L3 w0.085: J1.I6@13.3,14.5 13.033,14.5 12.723,14.81 12.723,15.283 13.939,16.5 v1@29.597,16.5 ; v1(29.597,16.383) 29.683,16.383 29.8,16.5 38.521,16.5 41.821,19.8 154.257,19.8 157.557,16.5 266.293,16.5 267.416,15.377 267.416,15.078 J14.I6@266.839,14.5
SLOT1.LVDS_9_P: J1.H6 J14.H6 | length 261.6
  L3 w0.085: J1.H6@11.9,14.5 12.167,14.5 12.478,14.81 12.478,15.385 13.838,16.745 v1@29.597,16.745 ; v1(29.597,16.863) 29.683,16.863 29.8,16.745 38.42,16.745 41.72,20.045 154.358,20.045 157.658,16.745 266.395,16.745 267.661,15.479 267.661,15.078 J14.H6@268.239,14.5
SLOT1.LVDS_10_N: J1.L6 J14.L6 | length 251.4
  L4 w0.085: J1.L6@17.5,14.5 17.233,14.5 16.923,14.81 16.923,14.998 17.571,15.646 18.846,15.646 21,17.8 38.525,17.8 39.554,18.829 47.8,18.829 47.917,18.711 v1(48.003,18.711) 48.088,18.711 48.205,18.829 58.696,18.829 60.971,16.554 153.926,16.554 154.38,16.1 262.416,16.1 263.216,15.3 263.216,15.078 J14.L6@262.639,14.5
SLOT1.LVDS_10_P: J1.K6 J14.K6 | length 252.2
  L4 w0.085: J1.K6@16.1,14.5 16.367,14.5 16.678,14.81 16.678,15.099 17.47,15.891 18.745,15.891 20.899,18.045 38.424,18.045 39.452,19.074 47.8,19.074 47.917,19.191 v1(48.003,19.191) 48.088,19.191 48.205,19.074 58.798,19.074 61.073,16.799 154.028,16.799 154.482,16.345 262.518,16.345 263.461,15.402 263.461,15.078 J14.K6@264.039,14.5
SLOT1.LVDS_11_N: J6.B1 J11.B1 | length 277.6
  Bottom Layer w0.11: J6.B1@3.4,81.5 3.16,81.5 2.82,81.84 2.82,82.274 2.937,82.391 43.193,82.391 44.442,83.64 55.587,83.64 56.836,82.391 276.943,82.391 277.119,82.216 277.119,81.967 276.651,81.5 J11.B1@276.539,81.5
SLOT1.LVDS_11_P: J6.A1 J11.A1 | length 278.3
  Bottom Layer w0.11: J6.A1@2,81.5 2.021,81.5 2.58,82.059 2.58,82.374 2.837,82.631 43.094,82.631 44.342,83.88 55.687,83.88 56.935,82.631 277.043,82.631 277.359,82.315 277.359,81.967 277.826,81.5 J11.A1@277.939,81.5
SLOT1.LVDS_12_N: J6.E1 J11.E1 | length 269.2
  Top Layer w0.11: J6.E1@7.6,81.5 7.02,82.08 7.02,82.2 7.231,82.411 26.351,82.411 27.005,83.065 37.821,83.065 38.523,82.363 45.831,82.363 46.486,81.708 48.308,81.708 48.977,82.377 272.854,82.377 272.919,82.313 272.919,82 272.419,81.5 J11.E1@272.339,81.5
SLOT1.LVDS_12_P: J6.D1 J11.D1 | length 270
  Top Layer w0.11: J6.D1@6.2,81.5 6.78,82.08 6.78,82.299 7.132,82.651 26.251,82.651 26.905,83.305 37.921,83.305 38.622,82.603 45.93,82.603 46.586,81.948 48.209,81.948 48.878,82.617 272.954,82.617 273.159,82.412 273.159,82.15 273.159,82 273.659,81.5 J11.D1@273.739,81.5
SLOT1.LVDS_13_N: J6.H1 J11.H1 | length 261.3
  L3 w0.085: J6.H1@11.8,81.5 11.533,81.5 11.223,81.81 11.223,82.299 11.321,82.398 17.956,82.398 19.449,80.904 27.003,80.904 27.182,80.725 34.39,80.725 34.447,80.668 34.575,80.668 34.593,80.685 v1(34.593,80.607) ; v1@34.601,80.685 34.618,80.668 34.738,80.668 34.795,80.725 49.093,80.725 49.923,81.555 260.532,81.555 261.375,82.398 268.6,82.398 268.716,82.281 268.716,82.078 J11.H1@268.139,81.5
SLOT1.LVDS_13_P: J6.G1 J11.G1 | length 262.1
  L3 w0.085: J6.G1@10.4,81.5 10.667,81.5 10.978,81.81 10.978,82.4 11.22,82.643 18.057,82.643 19.551,81.149 27.104,81.149 27.284,80.97 34.39,80.97 34.447,81.027 34.575,81.027 v1@34.593,81.01 ; v1(34.593,81.087) v1@34.593,81.01 ; J11.G1@269.539,81.5 268.961,82.078 268.961,82.383 268.702,82.643 261.273,82.643 260.43,81.8 49.822,81.8 48.991,80.97 34.795,80.97 34.738,81.027 34.61,81.027 v1@34.593,81.01
SLOT1.LVDS_14_N: J6.K1 J11.K1 | length 251.5
  L4 w0.085: J6.K1@16,81.5 15.733,81.5 15.423,81.81 15.423,82.224 15.781,82.583 31.752,82.583 31.755,82.586 47.667,82.586 47.784,82.468 47.955,82.468 48.072,82.586 262.255,82.586 262.593,82.248 264.149,82.248 264.516,81.881 264.516,81.81 264.206,81.5 J11.K1@263.939,81.5
  other v1: 47.87,82.468
SLOT1.LVDS_14_P: J6.J1 J11.J1 | length 252.4
  L4 w0.085: J6.J1@14.6,81.5 14.867,81.5 15.178,81.81 15.178,82.326 15.679,82.828 31.65,82.828 31.654,82.831 47.667,82.831 47.724,82.888 48.015,82.888 48.072,82.831 262.357,82.831 262.695,82.493 264.25,82.493 264.761,81.982 264.761,81.81 265.071,81.5 J11.J1@265.339,81.5 ; v1@47.87,82.871 v1(47.87,82.948)
SLOT2.LVDS_0_N: J3.C2 J29.C2 | length 273.9
  Bottom Layer w0.11: J3.C2@4.7,35.5 4.46,35.5 4.12,35.16 4.12,34.811 4.306,34.625 32.636,34.625 275.707,34.625 275.819,34.737 275.819,34.941 275.259,35.5 J29.C2@275.239,35.5
SLOT2.LVDS_0_P: J3.B2 J29.B2 | length 274.7
  Bottom Layer w0.11: J3.B2@3.3,35.5 3.54,35.5 3.88,35.16 3.88,34.711 4.206,34.385 32.636,34.385 275.806,34.385 276.059,34.637 276.059,34.941 276.618,35.5 J29.B2@276.639,35.5
SLOT2.LVDS_1_N: J3.F2 J29.F2 | length 265.5
  Top Layer w0.11: J3.F2@8.9,35.5 8.66,35.5 8.32,35.16 8.32,34.818 8.509,34.629 55.04,34.629 271.541,34.629 271.619,34.708 271.619,34.966 271.084,35.5 J29.F2@271.039,35.5
SLOT2.LVDS_1_P: J3.E2 J29.E2 | length 266.3
  Top Layer w0.11: J3.E2@7.5,35.5 7.74,35.5 8.08,35.16 8.08,34.719 8.409,34.389 55.04,34.389 271.64,34.389 271.859,34.608 271.859,34.966 272.393,35.5 J29.E2@272.439,35.5
SLOT2.LVDS_2_N: J2.F8 J33.F8 | length 265.6
  Top Layer w0.11: J2.F8@8.9,31.5 8.66,31.5 8.32,31.16 8.32,30.757 8.457,30.619 44.999,30.619 271.431,30.619 271.619,30.807 271.619,31.041 271.159,31.5 J33.F8@271.039,31.5
SLOT2.LVDS_2_P: J2.E8 J33.E8 | length 266.4
  Top Layer w0.11: J2.E8@7.5,31.5 7.74,31.5 8.08,31.16 8.08,30.657 8.358,30.379 44.999,30.379 271.531,30.379 271.859,30.707 271.859,31.041 272.318,31.5 J33.E8@272.439,31.5
SLOT2.LVDS_3_N: J3.H5 J29.H5 | length 260.6
  L3 w0.085: J3.H5@11.8,41.5 11.533,41.5 11.223,41.81 11.223,42.181 11.405,42.363 17.859,42.363 18.842,43.347 29.395,43.347 29.512,43.229 v1(29.597,43.229) 29.683,43.229 29.8,43.347 45.763,43.347 46.746,42.363 268.628,42.363 268.716,42.275 268.716,42.078 J29.H5@268.139,41.5
SLOT2.LVDS_3_P: J3.G5 J29.G5 | length 261.4
  L3 w0.085: J3.G5@10.4,41.5 10.667,41.5 10.978,41.81 10.978,42.282 11.304,42.608 17.757,42.608 18.74,43.592 29.395,43.592 29.512,43.709 v1(29.597,43.709) 29.683,43.709 29.8,43.592 45.865,43.592 46.848,42.608 268.73,42.608 268.961,42.377 268.961,42.078 J29.G5@269.539,41.5
SLOT2.LVDS_4_N: J3.K5 J29.K5 | length 252
  L4 w0.085: J3.K5@16,41.5 15.733,41.5 15.423,41.81 15.423,41.881 15.905,42.363 45.81,42.363 46.846,43.4 47.5,43.4 47.557,43.343 47.785,43.343 v1(47.845,43.283) 47.93,43.283 48.048,43.4 260.944,43.4 261.981,42.363 264.328,42.363 264.516,42.175 264.516,42.078 J29.K5@263.939,41.5
SLOT2.LVDS_4_P: J3.J5 J29.J5 | length 252.8
  L4 w0.085: J3.J5@14.6,41.5 14.867,41.5 15.178,41.81 15.178,41.982 15.804,42.608 45.708,42.608 46.745,43.645 47.5,43.645 47.557,43.702 47.785,43.702 v1(47.845,43.763) 47.93,43.763 48.048,43.645 261.046,43.645 262.083,42.608 264.43,42.608 264.761,42.277 264.761,42.078 J29.J5@265.339,41.5
SLOT2.LVDS_5_N: J2.H3 J33.H3 | length 259.7
  Top Layer w0.11: J2.H3@11.8,21.5 11.56,21.5 11.22,21.16 11.22,20.911 11.506,20.625 49.999,20.625 268.55,20.625 268.719,20.793 268.719,21.16 268.379,21.5 J33.H3@268.139,21.5
SLOT2.LVDS_5_P: J2.G3 J33.G3 | length 260.5
  Top Layer w0.11: J2.G3@10.4,21.5 10.64,21.5 10.98,21.16 10.98,20.812 11.407,20.385 49.999,20.385 268.65,20.385 268.959,20.694 268.959,21.16 269.299,21.5 J33.G3@269.539,21.5
SLOT2.LVDS_6_N: J2.K3 J33.K3 | length 251.9
  L4 w0.085: J2.K3@16,21.5 15.733,21.5 15.423,21.81 15.423,21.881 15.929,22.387 41.002,22.387 41.872,21.518 42.708,21.518 42.826,21.4 v1(42.911,21.4) 42.996,21.4 43.114,21.518 44.414,21.518 260.864,21.518 261.734,22.387 264.355,22.387 264.516,22.226 264.516,22.078 J33.K3@263.939,21.5
SLOT2.LVDS_6_P: J2.J3 J33.J3 | length 252.7
  L4 w0.085: J2.J3@14.6,21.5 14.867,21.5 15.178,21.81 15.178,21.982 15.828,22.632 41.103,22.632 41.973,21.763 42.708,21.763 42.826,21.88 v1(42.911,21.88) 42.996,21.88 43.114,21.763 44.515,21.763 260.763,21.763 261.632,22.632 264.457,22.632 264.761,22.328 264.761,22.078 J33.J3@265.339,21.5
SLOT2.LVDS_7_N: J2.C4 J33.C4 | length 273.8
  Bottom Layer w0.11: J2.C4@4.7,23.5 4.46,23.5 4.12,23.84 4.12,23.931 4.589,24.4 275.559,24.4 275.819,24.14 275.819,24.031 275.819,23.84 275.479,23.5 J33.C4@275.239,23.5
SLOT2.LVDS_7_P: J2.B4 J33.B4 | length 274.6
  Bottom Layer w0.11: J2.B4@3.3,23.5 3.54,23.5 3.88,23.84 3.88,24.031 4.489,24.64 275.658,24.64 276.059,24.24 276.059,23.931 276.059,23.84 276.399,23.5 J33.B4@276.639,23.5
SLOT2.LVDS_8_N: J2.F4 J33.F4 | length 265.6
  Top Layer w0.11: J2.F4@8.9,23.5 8.66,23.5 8.32,23.16 8.32,22.899 8.579,22.64 54.971,22.64 271.51,22.64 271.619,22.749 271.619,23.16 271.279,23.5 J33.F4@271.039,23.5
SLOT2.LVDS_8_P: J2.E4 J33.E4 | length 266.4
  Top Layer w0.11: J2.E4@7.5,23.5 7.74,23.5 8.08,23.16 8.08,22.799 8.479,22.4 54.971,22.4 271.609,22.4 271.859,22.649 271.859,23.16 272.199,23.5 J33.E4@272.439,23.5
SLOT2.LVDS_9_N: J2.I4 J33.I4 | length 259.7
  L3 w0.085: J2.I4@13.1,23.5 12.833,23.5 12.523,23.81 12.523,24.173 12.775,24.425 18.3,24.425 21.325,21.4 v1@34.617,21.4 ; v1(34.617,21.283) 34.703,21.283 34.82,21.4 34.895,21.4 41.111,21.4 42.098,22.387 55.284,22.387 57.322,24.425 267.266,24.425 267.416,24.275 267.416,24.078 J33.I4@266.839,23.5
SLOT2.LVDS_9_P: J2.H4 J33.H4 | length 260.5
  L3 w0.085: J2.H4@11.7,23.5 11.967,23.5 12.278,23.81 12.278,24.274 12.674,24.67 18.401,24.67 21.426,21.645 v1@34.617,21.645 ; v1(34.617,21.763) 34.703,21.763 34.82,21.645 34.997,21.645 41.009,21.645 41.996,22.632 55.182,22.632 57.22,24.67 267.368,24.67 267.661,24.377 267.661,24.078 J33.H4@268.239,23.5
SLOT2.LVDS_10_N: J2.L4 J33.L4 | length 249.4
  L4 w0.085: J2.L4@17.3,23.5 17.033,23.5 16.723,23.81 16.723,23.881 17.242,24.4 50.046,24.4 50.991,23.455 52.5,23.455 52.557,23.398 52.8,23.398 v1(52.86,23.338) 52.945,23.338 53.063,23.455 260.965,23.455 261.91,24.4 263.12,24.4 263.216,24.304 263.216,24.078 J33.L4@262.639,23.5
SLOT2.LVDS_10_P: J2.K4 J33.K4 | length 250.3
  L4 w0.085: J2.K4@15.9,23.5 16.167,23.5 16.478,23.81 16.478,23.982 17.14,24.645 50.148,24.645 51.093,23.7 52.5,23.7 52.557,23.757 52.8,23.757 v1(52.86,23.818) 52.945,23.818 53.063,23.7 260.863,23.7 261.808,24.645 263.222,24.645 263.461,24.406 263.461,24.078 J33.K4@264.039,23.5
SLOT2.LVDS_11_N: J6.C2 J11.C2 | length 274
  Bottom Layer w0.11: J6.C2@4.7,83.5 4.46,83.5 4.12,83.84 4.12,84.244 4.267,84.392 27.654,84.392 275.583,84.392 275.819,84.156 275.819,83.9 275.419,83.5 J11.C2@275.239,83.5
SLOT2.LVDS_11_P: J6.B2 J11.B2 | length 274.8
  Bottom Layer w0.11: J6.B2@3.3,83.5 3.54,83.5 3.88,83.84 3.88,84.344 4.168,84.632 27.654,84.632 275.683,84.632 276.059,84.256 276.059,83.9 276.459,83.5 J11.B2@276.639,83.5
SLOT2.LVDS_12_N: J6.F2 J11.F2 | length 265.5
  Top Layer w0.11: J6.F2@8.9,83.5 8.66,83.5 8.32,83.84 8.32,84.105 8.607,84.392 54.998,84.392 271.358,84.392 271.619,84.131 271.619,83.84 271.279,83.5 J11.F2@271.039,83.5
SLOT2.LVDS_12_P: J6.E2 J11.E2 | length 266.3
  Top Layer w0.11: J6.E2@7.5,83.5 7.74,83.5 8.08,83.84 8.08,84.204 8.507,84.632 54.998,84.632 271.457,84.632 271.859,84.23 271.859,84.131 271.859,83.931 271.859,83.84 272.199,83.5 J11.E2@272.439,83.5
SLOT2.LVDS_13_N: J6.I2 J11.I2 | length 258.1
  L3 w0.085: J6.I2@13.1,83.5 12.833,83.5 12.523,83.81 12.523,84.079 12.78,84.336 18.288,84.336 19.269,83.355 39.27,83.355 39.48,83.355 39.597,83.238 v1(39.683,83.238) 39.8,83.355 41.467,83.355 42.448,84.336 267.318,84.336 267.416,84.238 267.416,83.81 267.106,83.5 J11.I2@266.839,83.5
SLOT2.LVDS_13_P: J6.H2 J11.H2 | length 258.9
  L3 w0.085: J6.H2@11.7,83.5 11.967,83.5 12.278,83.81 12.278,84.18 12.678,84.581 18.389,84.581 19.37,83.6 39.169,83.6 39.48,83.6 39.597,83.718 v1(39.683,83.718) 39.8,83.6 41.365,83.6 42.346,84.581 267.419,84.581 267.661,84.339 267.661,83.81 267.971,83.5 J11.H2@268.239,83.5
SLOT2.LVDS_14_N: J6.L2 J11.L2 | length 249.6
  L4 w0.085: J6.L2@17.3,83.5 17.033,83.5 16.723,83.81 16.723,84.191 16.887,84.355 40.925,84.355 41.866,83.415 42.68,83.415 42.737,83.357 42.865,83.357 v1@42.882,83.375 ; v1(42.882,83.297) v1@42.882,83.375 ; J11.L2@262.639,83.5 263.205,84.066 263.205,84.198 263.048,84.355 260.955,84.355 260.015,83.415 43.085,83.415 43.028,83.357 42.899,83.357 v1@42.882,83.375
SLOT2.LVDS_14_P: J6.K2 J11.K2 | length 250.4
  L4 w0.085: J6.K2@15.9,83.5 16.167,83.5 16.478,83.81 16.478,84.293 16.785,84.6 41.027,84.6 41.967,83.66 42.68,83.66 42.737,83.717 42.865,83.717 v1@42.882,83.7 ; v1(42.882,83.777) v1@42.882,83.7 ; J11.K2@264.039,83.5 263.45,84.089 263.45,84.3 263.149,84.6 260.854,84.6 259.913,83.66 43.085,83.66 43.028,83.717 42.899,83.717 v1@42.882,83.7
SLOT3.LVDS_0_N: J3.I2 J29.I2 | length 258
  L3 w0.085: J3.I2@13.1,35.5 12.833,35.5 12.523,35.81 12.523,36.187 12.721,36.385 17.901,36.385 18.816,37.3 29.395,37.3 29.512,37.183 v1(29.597,37.183) 29.683,37.183 29.8,37.3 45.745,37.3 46.66,36.385 267.356,36.385 267.416,36.325 267.416,36.078 J29.I2@266.839,35.5
SLOT3.LVDS_0_P: J3.H2 J29.H2 | length 258.8
  L3 w0.085: J3.H2@11.7,35.5 11.967,35.5 12.278,35.81 12.278,36.288 12.619,36.63 17.799,36.63 18.714,37.545 29.395,37.545 29.512,37.663 v1(29.597,37.663) 29.683,37.663 29.8,37.545 45.846,37.545 46.761,36.63 267.458,36.63 267.661,36.427 267.661,36.078 J29.H2@268.239,35.5
SLOT3.LVDS_1_N: J3.L2 J29.L2 | length 249.4
  L4 w0.085: J3.L2@17.3,35.5 17.033,35.5 16.723,35.81 16.723,35.881 17.267,36.425 45.872,36.425 46.746,37.3 47.6,37.3 47.657,37.243 47.825,37.243 v1(47.885,37.183) 47.97,37.183 48.088,37.3 260.913,37.3 261.788,36.425 263.016,36.425 263.216,36.225 263.216,36.078 J29.L2@262.639,35.5
SLOT3.LVDS_1_P: J3.K2 J29.K2 | length 250.2
  L4 w0.085: J3.K2@15.9,35.5 16.167,35.5 16.478,35.81 16.478,35.982 17.165,36.67 45.77,36.67 46.645,37.545 47.6,37.545 47.657,37.602 47.825,37.602 v1(47.885,37.663) 47.97,37.663 48.088,37.545 261.014,37.545 261.889,36.67 263.118,36.67 263.461,36.327 263.461,36.078 J29.K2@264.039,35.5
SLOT3.LVDS_2_N: J2.I8 J33.I8 | length 258
  L3 w0.085: J2.I8@13.1,31.5 12.833,31.5 12.523,31.81 12.523,32.247 12.644,32.368 18.099,32.368 19.031,33.3 34.369,33.3 34.487,33.183 v1(34.572,33.183) 34.657,33.183 34.775,33.3 41.288,33.3 42.22,32.368 267.324,32.368 267.416,32.275 267.416,32.078 J33.I8@266.839,31.5
SLOT3.LVDS_2_P: J2.H8 J33.H8 | length 258.8
  L3 w0.085: J2.H8@11.7,31.5 11.967,31.5 12.278,31.81 12.278,32.348 12.542,32.613 17.998,32.613 18.93,33.545 34.369,33.545 34.487,33.663 v1(34.572,33.663) 34.657,33.663 34.775,33.545 41.389,33.545 42.321,32.613 267.425,32.613 267.661,32.377 267.661,32.078 J33.H8@268.239,31.5
SLOT3.LVDS_3_N: J3.C6 J29.C6 | length 274
  Bottom Layer w0.11: J3.C6@4.7,43.5 4.46,43.5 4.12,43.16 4.12,42.759 4.276,42.603 27.645,42.603 275.675,42.603 275.819,42.747 275.819,42.975 275.294,43.5 J29.C6@275.239,43.5
SLOT3.LVDS_3_P: J3.B6 J29.B6 | length 274.8
  Bottom Layer w0.11: J3.B6@3.3,43.5 3.54,43.5 3.88,43.16 3.88,42.66 4.176,42.363 27.645,42.363 275.774,42.363 276.059,42.648 276.059,42.975 276.584,43.5 J29.B6@276.639,43.5
SLOT3.LVDS_4_N: J3.F6 J29.F6 | length 265.6
  Top Layer w0.11: J3.F6@8.9,43.5 8.66,43.5 8.32,43.16 8.32,42.774 8.491,42.603 45.005,42.603 271.465,42.603 271.619,42.757 271.619,43.041 271.159,43.5 J29.F6@271.039,43.5
SLOT3.LVDS_4_P: J3.E6 J29.E6 | length 266.4
  Top Layer w0.11: J3.E6@7.5,43.5 7.74,43.5 8.08,43.16 8.08,42.675 8.392,42.363 45.005,42.363 271.564,42.363 271.859,42.658 271.859,43.041 272.318,43.5 J29.E6@272.439,43.5
SLOT3.LVDS_5_N: J4.H1 J12.H1 | length 260.6
  L3 w0.085: J4.H1@11.8,52.5 11.533,52.5 11.223,52.81 11.223,53.19 11.405,53.372 17.74,53.372 18.657,52.455 34.29,52.455 34.415,52.455 34.532,52.338 v1(34.617,52.338) 34.683,52.338 34.8,52.455 260.274,52.455 261.192,53.372 268.666,53.372 268.716,53.323 268.716,53.078 J12.H1@268.139,52.5
SLOT3.LVDS_5_P: J4.G1 J12.G1 | length 261.4
  L3 w0.085: J4.G1@10.4,52.5 10.667,52.5 10.978,52.81 10.978,53.291 11.304,53.617 17.841,53.617 18.759,52.7 34.188,52.7 34.415,52.7 34.532,52.818 v1(34.617,52.818) 34.683,52.818 34.8,52.7 260.173,52.7 261.09,53.617 268.768,53.617 268.961,53.424 268.961,53.078 J12.G1@269.539,52.5
SLOT3.LVDS_6_N: J4.K1 J12.K1 | length 251.4
  L4 w0.085: J4.K1@16,52.5 15.733,52.5 15.423,52.81 15.423,53.14 15.683,53.4 42.708,53.4 42.826,53.283 v1(42.911,53.283) ; v1@42.911,53.4 264.466,53.4 264.516,53.35 264.516,53.078 J12.K1@263.939,52.5
SLOT3.LVDS_6_P: J4.J1 J12.J1 | length 252.2
  L4 w0.085: J4.J1@14.6,52.5 14.867,52.5 15.178,52.81 15.178,53.241 15.581,53.645 42.708,53.645 42.826,53.763 v1(42.911,53.763) ; v1@42.911,53.645 264.568,53.645 264.761,53.452 264.761,53.078 J12.J1@265.339,52.5
SLOT3.LVDS_7_N: J4.C2 J12.C2 | length 273.9
  Top Layer w0.11: J4.C2@4.7,54.5 4.46,54.5 4.12,54.84 4.12,55.112 4.368,55.36 54.998,55.36 275.584,55.36 275.819,55.125 275.819,55.031 275.819,54.84 275.479,54.5 J12.C2@275.239,54.5
SLOT3.LVDS_7_P: J4.B2 J12.B2 | length 274.7
  Top Layer w0.11: J4.B2@3.3,54.5 3.54,54.5 3.88,54.84 3.88,55.211 4.269,55.6 54.998,55.6 275.683,55.6 276.059,55.224 276.059,54.931 276.059,54.84 276.399,54.5 J12.B2@276.639,54.5
SLOT3.LVDS_8_N: J4.F2 J12.F2 | length 265.5
  Bottom Layer w0.11: J4.F2@8.9,54.5 8.66,54.5 8.32,54.84 8.32,55.173 8.472,55.325 37.646,55.325 271.554,55.325 271.619,55.26 271.619,55.12 271.619,54.929 271.189,54.5 J12.F2@271.039,54.5
SLOT3.LVDS_8_P: J4.E2 J12.E2 | length 266.3
  Bottom Layer w0.11: J4.E2@7.5,54.5 7.74,54.5 8.08,54.84 8.08,55.272 8.373,55.565 37.646,55.565 271.654,55.565 271.859,55.36 271.859,55.021 271.859,54.929 272.288,54.5 J12.E2@272.439,54.5
SLOT3.LVDS_9_N: J4.I2 J12.I2 | length 258
  L3 w0.085: J4.I2@13.1,54.5 12.833,54.5 12.523,54.81 12.523,55.187 12.696,55.36 17.987,55.36 18.892,54.455 39.271,54.455 39.396,54.455 39.513,54.338 v1(39.598,54.338) 39.683,54.338 39.8,54.455 40.41,54.455 41.315,55.36 267.366,55.36 267.416,55.31 267.416,55.078 J12.I2@266.839,54.5
SLOT3.LVDS_9_P: J4.H2 J12.H2 | length 258.8
  L3 w0.085: J4.H2@11.7,54.5 11.967,54.5 12.278,54.81 12.278,55.288 12.594,55.605 18.089,55.605 18.994,54.7 39.169,54.7 39.396,54.7 39.513,54.818 v1(39.598,54.818) 39.683,54.818 39.8,54.7 40.309,54.7 41.214,55.605 267.468,55.605 267.661,55.412 267.661,55.078 J12.H2@268.239,54.5
SLOT3.LVDS_10_N: J4.L2 J12.L2 | length 249.5
  L4 w0.085: J4.L2@17.3,54.5 17.033,54.5 16.723,54.81 16.723,55.126 16.957,55.36 40.258,55.36 41.163,54.455 52.722,54.455 52.84,54.338 v1(52.925,54.338) 53.01,54.338 53.128,54.455 259.753,54.455 260.658,55.36 263.136,55.36 263.216,55.28 263.216,55.078 J12.L2@262.639,54.5
SLOT3.LVDS_10_P: J4.K2 J12.K2 | length 250.3
  L4 w0.085: J4.K2@15.9,54.5 16.167,54.5 16.478,54.81 16.478,55.227 16.855,55.605 40.359,55.605 41.264,54.7 52.722,54.7 52.84,54.818 v1(52.925,54.818) 53.01,54.818 53.128,54.7 259.651,54.7 260.556,55.605 263.238,55.605 263.461,55.381 263.461,55.078 J12.K2@264.039,54.5